# EAGLE board Stromsenke Board (EAGLE 8.3.2)

Size 100 x 80 mm. Coordinates in mm from the lower left corner, seen from the top.
Outline: 0,0 100,0 100,80 0,80 0,0
Copper layers (1*16): Top 0.035mm / dielectric 1.5mm / Bottom 0.035mm
Design rules "default": minimum track width 6mil, minimum drill 0.35mm, track to track 6mil, track to pad 6mil, pad to pad 6mil, via to via 6mil, smd to smd 6mil, copper to edge 40mil, drill to drill 6mil, minimum pad ring 10mil, minimum via ring 8mil, stop-mask expansion 4mil, vias tented up to drill 0mil, thermal gap 10mil

## Footprints (pad centres in the part's own frame; a part is rotated, then mirrored left to right if it is on the bottom)
C5B2.5 = drill 0.813 pad 1.6 octagon: 1 -2.54,0; 2 2.54,0
E3,5-8 = drill 0.813 pad 1.6: + -1.778,0 | drill 0.813 pad 1.6 octagon: - 1.778,0
E3,5-10 = drill 0.813 pad 1.6: + -1.778,0 | drill 0.813 pad 1.6 octagon: - 1.778,0
C1702-15 = drill 1.397 long: A 7.62,0; C -7.62,0
DIL08 = drill 0.813 pad 1.27: 1 -3.81,-3.81; 2 -1.27,-3.81; 3 1.27,-3.81; 4 3.81,-3.81; 5 3.81,3.81; 6 1.27,3.81; 7 -1.27,3.81; 8 -3.81,3.81
TO247BV = drill 1.499 long: D 0,-2.921; G -5.588,-2.921; S 5.588,-2.921
0207/10 = drill 0.813 octagon: 1 -5.08,0; 2 5.08,0
MA04-1 = drill 1.016 long: 1 -3.81,0; 2 -1.27,0; 3 1.27,0; 4 3.81,0
FE06 = drill 0.813 long: 1 -6.35,0; 2 -3.81,0; 3 -1.27,0; 4 1.27,0; 5 3.81,0; 6 6.35,0

## Placement (x,y rotation side)
C1  100n  [C5B2.5]  86.36,25.4 0 top
C2  100n  [C5B2.5]  -24.13,25.4 0 top  (outside the outline)
C3  100n  [C5B2.5]  -31.75,25.4 0 top  (outside the outline)
C4  [E3,5-8]  57.15,58.42 0 top
C5  [E3,5-8]  57.15,50.8 0 top
C6  [E3,5-10]  57.15,67.31 0 top
C7  [E3,5-10]  57.15,43.18 0 top
C8  100n  [C5B2.5]  59.69,7.62 0 top
D1  8,7V  [C1702-15]  95.25,22.86 270 top
D2  5v  [C1702-15]  13.97,76.2 0 top
IC1  LM358N  [DIL08]  87.63,35.56 0 top
Q1  IRFPC40  [TO247BV]  91.44,0 180 top
R1  1k  [0207/10]  91.44,10.16 0 top
R2  0R1  [0207/10]  31.75,5.08 0 top
R3  2k7  [0207/10]  -31.75,43.18 0 top  (outside the outline)
R4  330R  [0207/10]  -44.45,43.18 0 top  (outside the outline)
R5  10k  [0207/10]  -19.05,48.26 0 top  (outside the outline)
R6  3k3  [0207/10]  -31.75,48.26 0 top  (outside the outline)
R7  1k  [0207/10]  -44.45,48.26 0 top  (outside the outline)
R8  670R  [0207/10]  10.16,69.85 0 top
R10  560R  [0207/10]  13.97,54.61 0 top
SV1  [MA04-1]  81.28,71.12 0 top
SV2  [FE06]  83.82,66.04 0 top

## Library data of the parts
C1-C3 C8 = capacitor-wima
C4-C7 = resistor
D1 D2 = diode
IC1 = linear
Q1 = transistor-power
R1-R8 R10 = eagle-ltspice; SPICEMODEL: NONE; SPICEPREFIX: R
SV1 = con-lstb; OC_FARNELL: unknown; OC_NEWARK: unknown
SV2 = con-lsta; OC_FARNELL: unknown; OC_NEWARK: unknown

## Nets
GND: C2.1 C4.- C5.- C6.- C7.- C8.1 D2.A IC1.4 R2.1 R4.1 R8.2 SV1.1 SV2.1 SV2.5
I_OUT: C3.1 IC1.7
N$1: D1.A Q1.G R1.2
N$2: IC1.3 R6.1
N$3: SV1.3 SV2.3
N$4: C2.2 D2.C R5.1 SV1.2 SV2.2
N$5: Q1.S R1.1 R2.2 R7.2
N$6: C1.2 D1.C IC1.1
N$7: IC1.5 R7.1
N$8: R3.1 R4.2 R6.2
N$9: C1.1 IC1.2 R10.1
N$10: C3.2 IC1.6 R8.1
N$11: R10.2 SV2.6
N$12: SV1.4 SV2.4
VCC: C4.+ C5.+ C6.+ C7.+ C8.2 IC1.8 Q1.D R3.2 R5.2

## Tracks (layer width: path | path; a pad name or v marks a point on that pad's centre or on a via)
GND  (13 unrouted)
I_OUT  (1 unrouted)
N$1  (2 unrouted)
N$2  (1 unrouted)
N$3  (1 unrouted)
N$4  (4 unrouted)
N$5  (3 unrouted)
N$6  (2 unrouted)
N$7  (1 unrouted)
N$8  (2 unrouted)
N$9  (2 unrouted)
N$10  (2 unrouted)
N$11  (1 unrouted)
N$12  (1 unrouted)
VCC  (8 unrouted)